# Altium PCB 集成板.PcbDoc
Units mil, origin at the board's own origin, x right, y up, seen from the top; angles counter-clockwise.
Board outline 6000 x 4000 mil, 2 copper layers (Top Layer, Bottom Layer); 47 components, 38 nets, 184 pads, 0 vias.
Unrouted connection lines stored in the file: 127.
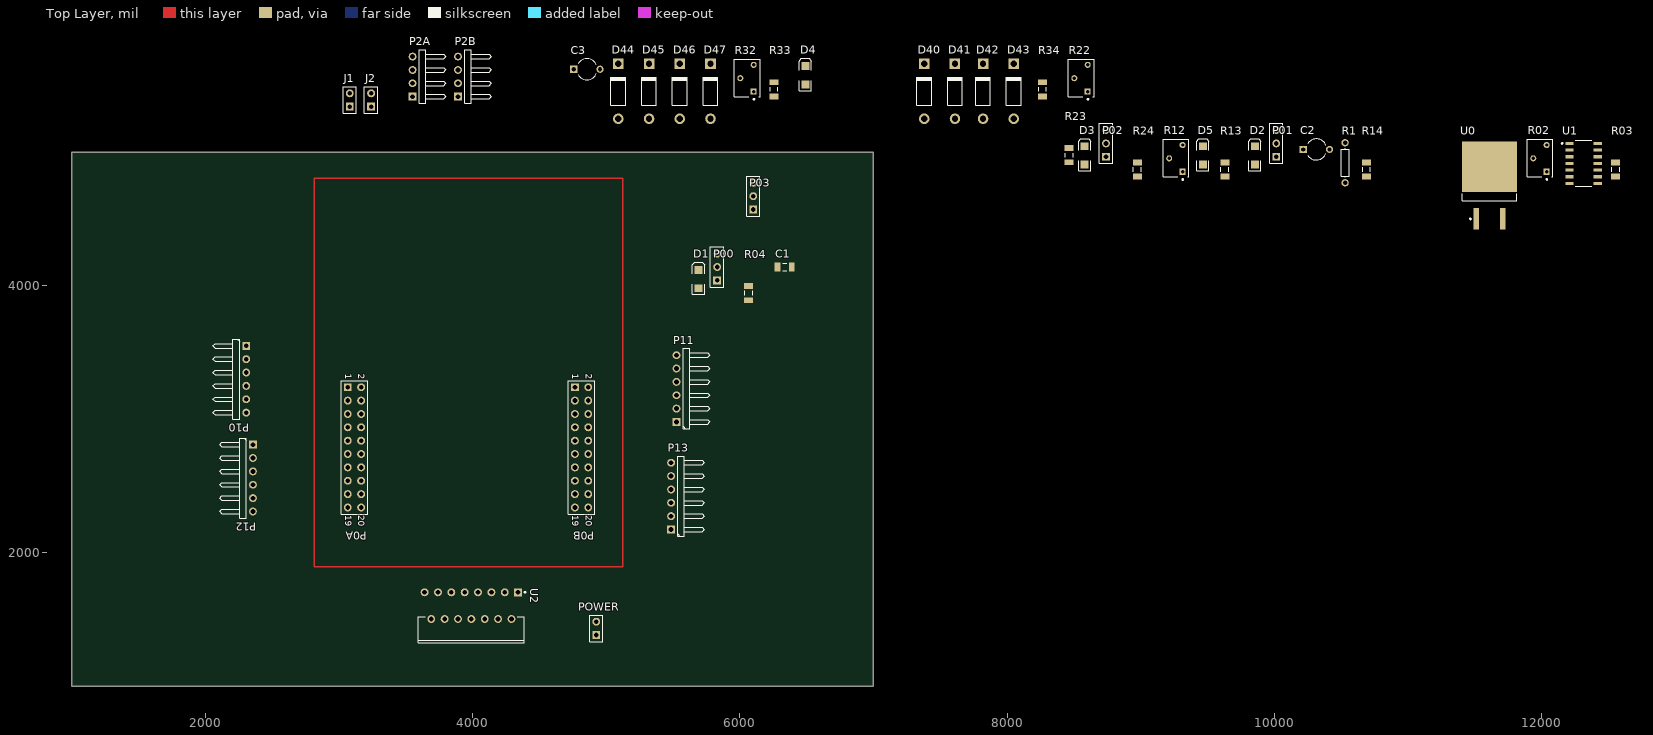
[diagram p0: Top Layer view]
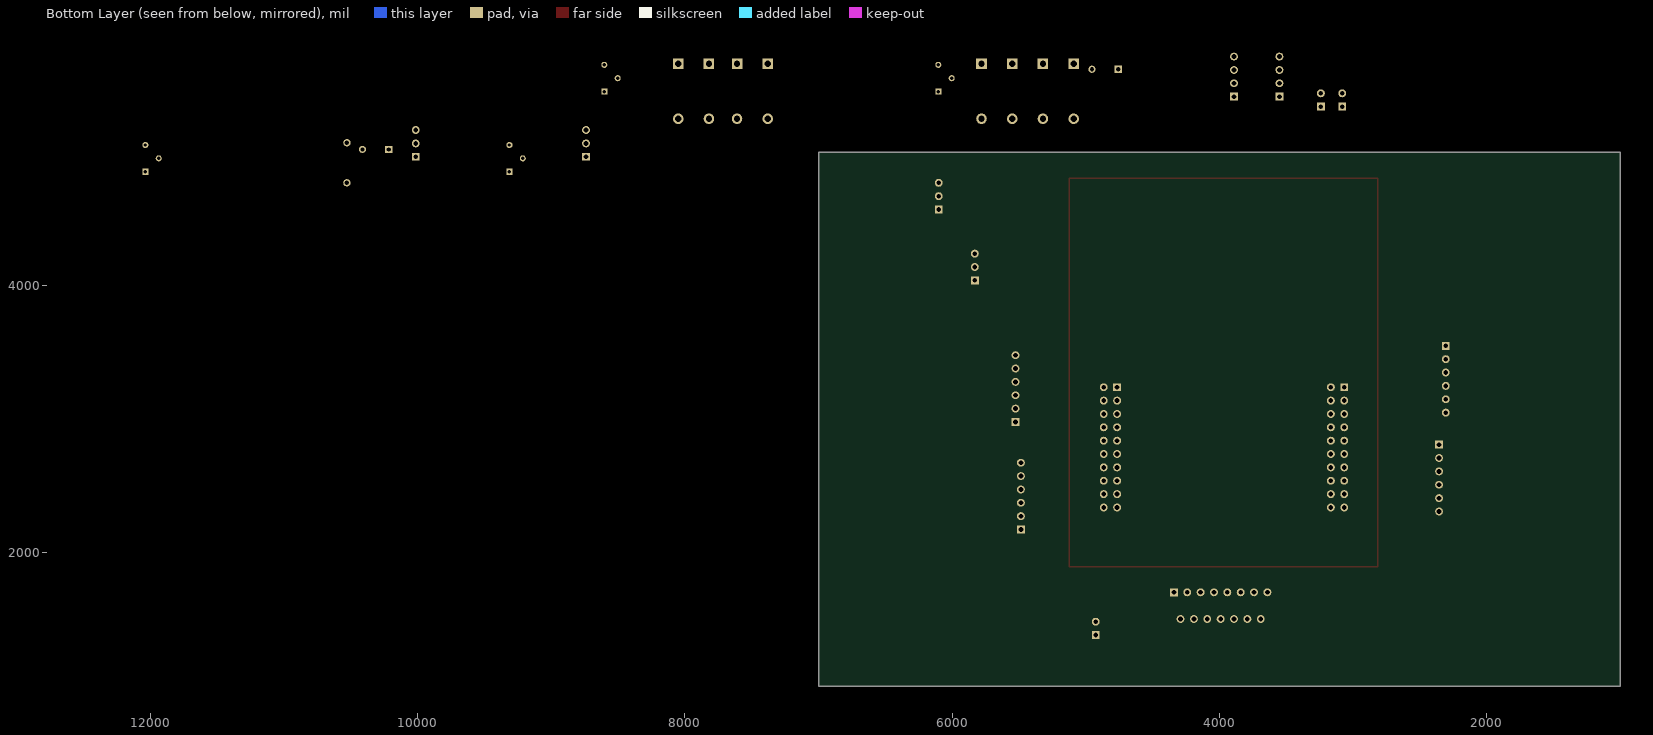
[diagram p1: Bottom Layer view, seen from below]

## Layer stack, top to bottom
Top Solder: solder mask 0.4, Solder Resist, Dk 3.5
Top Layer: signal copper 1.4
Dielectric 1: dielectric 12.6, FR-4, Dk 4.8
Bottom Layer: signal copper 1.4
Bottom Solder: solder mask 0.4, Solder Resist, Dk 3.5

## Board outline
1000,1000 7000,1000 7000,5000 1000,5000

## Design rules (kind name [scope] priority, off if disabled: settings)
Clearance [All] p1: gap=10 ignorepadtopadclearanceinfootprint=FALSE except(0: Arc-Hole Track-Hole SMDPad-Hole THPad-Hole Via-Hole Fill-Hole Poly-Hole Region-Hole Text-Hole)
PolygonConnect [All] p1: connectstyle=Relief reliefconductorwidth=10 reliefentries=4 polygonreliefangle="90 Angle" airgapwidth=10
RoutingVias [All] p1: holewidth=28 width=50 viastyle="Through Hole" minholewidth=28 minwidth=50 maxholewidth=28 maxwidth=50
SolderMaskExpansion [All] p1: expansion=4 istentingtop=FALSE
Width [All] p1: maxlimit=10 minlimit=10 preferedwidth=10
30 further rules are at their usual default settings.

## Components (designator, comment, footprint, x,y, rotation, side; value= is the part's Value field where it differs from the comment)
C1 "Cap Semi" C1206 6335,4140 r0 top value=100pF
C2 "Cap2" CAPR5-4X5 10315,5020 r0 top value=220uF
C3 "Cap2" CAPR5-4X5 4855,5620 r0 top value=220uF
D1 "LED2" 3.2X1.6X1.1 5690,4050 r90 top
D2 "LED2" 3.2X1.6X1.1 9855,4975 r90 top
D3 "LED2" 3.2X1.6X1.1 8580,4975 r90 top
D4 "LED2" 3.2X1.6X1.1 6490,5575 r90 top
D5 "LED2" 3.2X1.6X1.1 9465,4975 r90 top
D40 "Diode 1N4007" DO-41 7380,5455 r90 top
D41 "Diode 1N4007" DO-41 7610,5455 r90 top
D42 "Diode 1N4007" DO-41 7820,5455 r90 top
D43 "Diode 1N4007" DO-41 8050,5455 r90 top
D44 "Diode 1N4007" DO-41 5090,5455 r90 top
D45 "Diode 1N4007" DO-41 5320,5455 r90 top
D46 "Diode 1N4007" DO-41 5550,5455 r90 top
D47 "Diode 1N4007" DO-41 5780,5455 r90 top
J1 "Header 2" HDR1X2 3080,5340 r90 top
J2 "Header 2" HDR1X2 3240,5340 r90 top
P00 "Header 3" HDR1X3 5830,4040 r90 top
P0A "Header 10X2" HDR2X10 3065,3240 r270 top
P0B "Header 10X2" HDR2X10 4765,3240 r270 top
P01 "Header 3" HDR1X3 10015,4965 r90 top
P02 "Header 3" HDR1X3 8740,4965 r90 top
P2A "Header 4H" HDR1X4H 3550,5415 r90 top
P2B "Header 4H" HDR1X4H 3890,5415 r90 top
P03 "Header 3" HDR1X3 6100,4570 r90 top
P10 "Header 6H" HDR1X6H 2305,3550 r270 top
P11 "Header 6H" HDR1X6H 5525,2980 r90 top
P12 "Header 6H" HDR1X6H 2355,2810 r270 top
P13 "Header 6H" HDR1X6H 5485,2175 r90 top
POWER "Header 2" HDR1X2 4925,1385 r90 top
R1 "Res1" AXIAL-0.3 10530,4920 r90 top value=1K
R02 "3266W-1-103LF" FP-3266W-MFG 11990,4955 r90 top value=10kΩ
R03 "Res2" C1206 12555,4870 r90 top value=1K
R04 "Res2" C1206 6065,3945 r90 top value=1K
R12 "3266W-1-103LF" FP-3266W-MFG 9265,4955 r90 top value=10kΩ
R13 "Res2" C1206 9630,4870 r90 top value=1K
R14 "Res2" C1206 10690,4870 r90 top value=1K
R22 "3266W-1-103LF" FP-3266W-MFG 8555,5555 r90 top value=10kΩ
R23 "Res2" C1206 8465,4976.85 r90 top value=1K
R24 "Res2" C1206 8975,4870 r90 top value=1K
R32 "3266W-1-103LF" FP-3266W-MFG 6055,5555 r90 top value=10kΩ
R33 "Res2" C1206 6255,5470 r90 top value=1K
R34 "Res2" C1206 8265,5470 r90 top value=1K
U0 "L7805CD2T-TR" TO-263_M 11610,4750 r90 top
U1 "LM339DR" FP-D0014A-MFG 12315,4915 r0 top
U2 "L298N" STM-FM-15 3990,1605 r270 top

## Footprints (in the part's own frame and the unit in brackets; to place one, negate y for a bottom-side part, rotate by r counter-clockwise, add the part's x,y. Pads: shape width x height; smd on the part's side, far side on the other; paste and mask are expansions set on the pad)
3.2X1.6X1.1 [mm] "SMT LED; 2 Flat Leads"
  rect 1.5x1.5 smd: 1(-1.75,0) 2(1.75,0)
  silkscreen extent -2.9,-1.15 3.2,1.15
AXIAL-0.3 [mm] "Axial Device, Thru-Hole; 2 Leads; 0.3 in Pin Spacing"
  round 1.4 hole 0.85: 1(-3.81,0) 2(3.81,0)
  silkscreen extent -2.77,-0.76 2.77,0.76
C1206 [mm] "Chip Capacitor, Body 3.2x1.6mm, IPC High Density"
  rect 1.1x1.7 smd: 1(-1.35,0) 2(1.35,0)
  silkscreen extent -0.4,-0.75 0.4,0.75, body extent -1.7,-0.9 1.7,0.9, height 1.3
CAPR5-4X5 [mm] "Capacitor; 2 Leads"
  rect 1.35x1.35 hole 0.8: 1(-2.5,0)
  round 1.35 hole 0.8: 2(2.5,0)
  silkscreen extent -1.69,-2 1.82,2
DO-41 [mm] "Diode, Axial; Body 5.2 x 2.7 mm (LxDia. max), Lead Dia. 0.86 mm (max)"
  round 2 hole 1.2: 1(-5.23,0)
  rect 2x2 hole 1.2: 2(5.23,0)
  silkscreen extent -2.65,-1.4 2.75,1.4
FP-3266W-MFG [mm]
  rect 1.15x1.15 hole 0.65 paste-1000 mask+0: 1(-2.595,-1.23)
  round 1.15 hole 0.65 paste-1000 mask+0: 2(-0.055,1.31) 3(2.485,-1.23)
  silkscreen extent -4.17,-2.44 3.54,2.44, body extent -3.64,-2.54 3.64,2.54, height 0.25
FP-D0014A-MFG [mm]
  rect 1.55x0.6 smd paste-1000 mask+0: 1(-2.7,3.81) 2(-2.7,2.54) 3(-2.7,1.27) 4(-2.7,0) 5(-2.7,-1.27) 6(-2.7,-2.54) 7(-2.7,-3.81) 8(2.7,-3.81) 9(2.7,-2.54) 10(2.7,-1.27) 11(2.7,0) 12(2.7,1.27) 13(2.7,2.54) 14(2.7,3.81)
  silkscreen extent -4.2,-4.38 1.55,4.38, body extent -3.57,-4.62 3.57,4.62, height 0.25
HDR1X2 [mm] "Connector; Header; 2 Position"
  rect 1.5x1.5 hole 0.9: 1(0,0)
  round 1.5 hole 0.9: 2(2.54,0)
  silkscreen extent -1.27,-1.27 3.81,1.27
HDR1X3 [mm] "Connector; Header; 3 Position"
  rect 1.5x1.5 hole 0.9: 1(0,0)
  round 1.5 hole 0.9: 2(2.54,0) 3(5.08,0)
  silkscreen extent -1.27,-1.27 6.35,1.27
HDR1X4H [mm] "Connector; Header; 4 Position; Right Angle"
  rect 1.5x1.5 hole 0.9: 1(0,0)
  round 1.5 hole 0.9: 2(2.54,0) 3(5.08,0) 4(7.62,0)
  silkscreen extent -1.27,-6.35 8.89,-1.27
HDR1X6H [mm] "Connector; Header; 6 Position; Right Angle"
  rect 1.5x1.5 hole 0.9: 1(0,0)
  round 1.5 hole 0.9: 2(2.54,0) 3(5.08,0) 4(7.62,0) 5(10.16,0) 6(12.7,0)
  silkscreen extent -1.27,-6.35 13.97,-1.27
HDR2X10 [mm] "Connector; Header; 10x2 Position"
  rect 1.5x1.5 hole 0.9: 1(0,0)
  round 1.5 hole 0.9: 2(0,2.54) 3(2.54,0) 4(2.54,2.54) 5(5.08,0) 6(5.08,2.54) 7(7.62,0) 8(7.62,2.54) 9(10.16,0) 10(10.16,2.54) 11(12.7,0) 12(12.7,2.54) 13(15.24,0) 14(15.24,2.54) 15(17.78,0) 16(17.78,2.54) 17(20.32,0) 18(20.32,2.54) 19(22.86,0) 20(22.86,2.54)
  silkscreen extent -1.27,-1.27 24.13,3.81
STM-FM-15 [mm] "FM, 15-Leads, Body 20.2x5mm, Pitch 1.27mm"
  rect 1.5x1.5 hole 0.9: 1(-2.54,8.89)
  round 1.5 hole 0.9: 2(2.54,7.62) 3(-2.54,6.35) 4(2.54,5.08) 5(-2.54,3.81) 6(2.54,2.54) 7(-2.54,1.27) 8(2.54,0) 9(-2.54,-1.27) 10(2.54,-2.54) 11(-2.54,-3.81) 12(2.54,-5.08) 13(-2.54,-6.35) 14(2.54,-7.62) 15(-2.54,-8.89)
  silkscreen extent -2.66,-10.1 7.09,10.32, body extent -2.8,-10.1 7.09,10.1, height 21
TO-263_M [mm] "D2-PAK, 4-Leads, Body 9.2x10.2mm, Pitch 2.54mm, Lead Span 15.4mm, IPC Low Density"
  rect 4.1x1.05 smd: 1(-6.35,2.54) 3(-6.35,-2.54)
  rect 9.6x10.45 smd: 4(3.6,0)
  silkscreen extent -6.47,-5.2 -1.6,5.2, body extent -2.9,-5.2 6.45,5.2, height 4.6

## Part data
C1: "Capacitor (Semiconductor SIM Model)", LatestRevisionDate=29-May-2009, LatestRevisionNote="IPC-7351 Footprint Added.", PackageDescription="Chip Capacitor", PackageReference=C1206, Published=8-Jun-2000, Publisher="Altium Limited"
C2 C3: "Capacitor", PackageDescription="Capacitor; 2 Leads", PackageReference=CAPR5-4X5, Published=23-Sep-2002, Publisher="Altium Limited"
D1 D2 D3 D4 D5: "Typical RED, GREEN, YELLOW, AMBER GaAs LED", LatestRevisionDate=17-Jul-2002, LatestRevisionNote="Re-released for DXP Platform.", PackageDescription="SM LED; 2 Flat Leads", PackageReference=3.2X1.6X1.1, PackageVersion=Feb-2002, Published=8-Jun-2000, Publisher="Altium Limited"
D40 D41 D42 D43 D44 D45 D46 D47: "1 Amp General Purpose Rectifier", Code_JEDEC=DO-204-AL, ComponentLink1Description="Manufacturer Link", ComponentLink1URL=http://www.fairchildsemi.com/, ComponentLink2Description=Datasheet, ComponentLink2URL=http://www.fairchildsemi.com/ds/1N%2F1N4001.pdf, DatasheetVersion=1998, LatestRevisionDate=17-Jul-2002, LatestRevisionNote="Re-released for DXP Platform.", PackageDescription="Diode, Axial; Body 5.2 x 2.7 mm (LxDia. max), Lead Dia. 0.86 mm (max)", PackageReference=DO-41, PackageVersion=Aug-1999, Published=8-Jun-2000, Publisher="Altium Limited"
J1 J2 POWER: "Header, 2-Pin", LatestRevisionDate=17-Jul-2002, LatestRevisionNote="Re-released for DXP Platform.", Publisher="Altium Limited"
P00 P01 P02 P03: "Header, 3-Pin", LatestRevisionDate=17-Jul-2002, LatestRevisionNote="Re-released for DXP Platform.", Publisher="Altium Limited"
P0A P0B: "Header, 10-Pin, Dual row", LatestRevisionDate=17-Jul-2002, LatestRevisionNote="Re-released for DXP Platform.", Publisher="Altium Limited"
P2A P2B: "Header, 4-Pin, Right Angle", LatestRevisionDate=17-Jul-2002, LatestRevisionNote="Re-released for DXP Platform.", Publisher="Altium Limited"
P10 P11 P12 P13: "Header, 6-Pin, Right Angle", LatestRevisionDate=17-Jul-2002, LatestRevisionNote="Re-released for DXP Platform.", Publisher="Altium Limited"
R1 R03 R04 R13 R14 R23 R24 R33 R34: "Resistor", LatestRevisionDate=17-Jul-2002, LatestRevisionNote="Re-released for DXP Platform.", Published=8-Jun-2000, Publisher="Altium Limited"
  R1: PackageDescription="Axial Device, Thru-Hole; 2 Leads; 0.3 in Pin Spacing", PackageReference=AXIAL-0.3
  R03 R04 R13 R14 R23 R24 R33 R34: PackageDescription="Axial Device, Thru-Hole; 2 Leads; 0.4 in Pin Spacing", PackageReference=AXIAL-0.4
R02 R12 R22 R32: library part CMP-07234-000016-1, "TRIMMER 10K OHM 0.25W PC PIN TOP", Manufacturer=Bourns, Package=3266W, Power Rating=0.25W, Resistance=10kΩ, Temperature="-55°C to +125°C", Temperature Coefficient=100ppm/°C, Temperature Range High=+125°C, Temperature Range Low=-55°C, Tolerance=10%, Automotive=No, Category=Res, ComponentLink2Description=Datasheet, ComponentLink2URL=https://www.bourns.com/docs/Product-Datasheets/3266.pdf, Composition=Cermet, Device Class L1="Passive Components", Device Class L2=Resistors, Device Class L3="Variable Resistors and Potentiometers", Digikey Description="TRIMMER 10K OHM 0.25W PC PIN TOP", Height=9.02mm, Lead Free=Yes, Manufacturer Part Number=3266W-1-103LF, Mouser Description="Trimmer Resistors - Through Hole 1/4 10Kohms 10% SQ W/Standoff Sealed", Octopart=https://octopart.com/3266w-1-103lf-bourns-81445, RoHS=TRUE, Series=3266, Standoff Height=0.43mm
U0: library part CMP-0244-00213-1, "Positive Voltage Regulator, 3-Pin D2PAK, Tape and Reel", ComponentLink1Description="Manufacturer URL", ComponentLink1URL=http://www.st.com, ComponentLink2Description=Datasheet, ComponentLink2URL=http://www.st.com/internet/com/TECHNICAL_RESOURCES/TECHNICAL_LITERATURE/DATASHEET/CD00000444.pdf, DatasheetVersion=16/11/2011, PackageDescription="3-Pin Transistor Outline Package 2.54 mm Pitch, 15.4 mm Lead Span (D2PAK)", PackageReference=TO-263, PackageVersion=2011
U1: library part CMP-04896-000028-1, "IC QUAD DIFF COMP 14-SOIC", Input Bias Current=-0.025uA, Input Offset Voltage=2mV, Manufacturer="Texas Instruments", Max Dual Supply Voltage=18V, Max Junction Temp=+70°C, Max Supply Voltage=30V, Min Dual Supply Voltage=1V, Min Supply Voltage=2V, Nominal Supply Current=0.8mA, Output Current Per Channel=6mA, Package=D0014A, Temperature="0°C to +70°C", Temperature Range Low=0°C, Automotive=No, Category=IC, ComponentLink2Description=Datasheet, ComponentLink2URL=http://www.ti.com/lit/ds/symlink/lm339.pdf, Device Class L1="Integrated Circuits (ICs)", Device Class L2="Linear ICs", Device Class L3=Comparators, Digikey Description="IC QUAD DIFF COMP 14-SOIC", Height=1.75mm, Ipc Land Pattern Name=SOIC127P600X175-14, Lead Free=Yes, Manufacturer Part Number=LM339DR, Mouser Description="Analog Comparators Quad Differential", Number Of Channels=4, Octopart=https://octopart.com/lm339dr-texas+instruments-45532, Response Time=1.3us, RoHS=TRUE, Standoff Height=0.1mm, Temperature Range High=+70°C
U2: library part CMP-2000-06526-1, "Dual Full-Bridge Driver, 4.8 to 46 V, -40 to 150 degC, 15-Pin FM (MW 15L), RoHS, Tube", Driver Case Style=Multiwatt, Manufacturer=STMicroelectronics, Operating Temperature Max=130°C, Operating Temperature Min=-25°C, Output Current=2A, Output Voltage=46V, Package Description="15-Pin Flange Mount, Body 5 x 19.6 mm, Pitch 1.27 mm", Package Reference=FM-15, PartNumber=L298, Supply Voltage Max=7V, Supply Voltage Min=4.5V, Automotive Qualification Standard=-, Datasheet URL=https://datasheet.ciiva.com/15109/getdatasheetpartid-50682-15109332.pdf, Datasheet Version=01/2000, Manufacturer URL=http://www.st.com/, Motor Type=FullBridge, Mounting Technology=ThroughHole, MSL=-, No. of Outputs=4Outputs, No. of Pins=15Pins, Packaging=Each, Product Range=-, SVHC=NoSVHC(17-Dec-2015)

## Nets (pads, with @x,y where several pads share a name; then routed paths per layer and width w, separated by ;. In a path a pad name is that pad's centre, name@x,y a point inside that pad or via, vN(x,y) a via of type N, cw(c..) or ccw(c..) an arc to the next point about the centre after c; other vN are vias at no path point)
+5: C1.1 C2.1 C3.1 D40.2 D41.2 D42.2 D43.2 J1.1 J2.1 P00.3 P0A.2 P01.3 P02.3 P2A.1 P2A.2 P2A.3 P2A.4 P03.3 P10.2 P11.2 P12.2 P13.2 R1.2 R02.1 R03.2 R04.1 R12.1 R13.2 R14.2 R22.1 R23.1 R24.2 R32.1 R33.2 R34.2 U0.3 U1.3 U2.9
+12: POWER.1 U0.1 U2.4
E1A: P0A.3 P10.3
E1B: P0A.9 P10.4
E2A: P0B.14 P11.3
E2B: P0B.16 P11.4
E3A: P0A.11 P12.3
E3B: P0A.15 P12.4
E4A: P0B.18 P13.3
E4B: P0B.20 P13.4
GND: C1.2 C2.2 C3.2 D5.2 D44.1 D45.1 D46.1 D47.1 P00.1 P0A.4 P0B.2 P01.1 P02.1 P2B.1 P2B.2 P2B.3 P2B.4 P03.1 P10.5 P11.5 P12.5 P13.5 POWER.2 R02.3 R12.3 R22.3 R32.3 U0.4 U1.12 U2.1 U2.8 U2.15
IR0: D1.2 P0A.6 R03.1 U1.1
IR1: D2.2 P0A.8 R13.1 U1.2
IR2: D3.2 P0A.10 R23.2 U1.14
IR3: D4.2 P0A.12 R33.1 U1.13
M10: D40.1 D44.2 P10.6 P12.6 U2.2
M11: D41.1 D45.2 P10.1 P12.1 U2.3
M20: D42.1 D46.2 P11.6 P13.6 U2.13
M21: D43.1 D47.2 P11.1 P13.1 U2.14
MA1: P0B.9 U2.5
MA2: P0B.11 U2.7
MB1: P0B.13 U2.10
MB2: P0B.15 U2.12
NetD1_1: D1.1 R04.2
NetD2_1: D2.1 R14.1
NetD3_1: D3.1 R24.1
NetD4_1: D4.1 R34.1
NetD5_1: D5.1 R1.1
NetP00_2: P00.2 U1.7
NetP01_2: P01.2 U1.5
NetP02_2: P02.2 U1.9
NetP03_2: P03.2 U1.11
NetR02_2: R02.2 U1.6
NetR12_2: R12.2 U1.4
NetR22_2: R22.2 U1.8
NetR32_2: R32.2 U1.10
PWM1: J2.2 P0B.1 U2.6
PWM2: J1.2 P0B.3 U2.11
pads on no net: P0A.1 P0A.5 P0A.7 P0A.13 P0A.14 P0A.16 P0A.17 P0A.18 P0A.19 P0A.20 P0B.4 P0B.5 P0B.6 P0B.7 P0B.8 P0B.10 P0B.12 P0B.17 P0B.19
copper on no net: | length 10440
  Top Layer w10: 2815,1895 5125,1895 5125,4805 2815,4805 2815,1895

## Text inside footprints (layer, text, board x,y; h text height)
P0A: Top Overlay "20" at 3145,2280 h50 r270; Top Overlay "19" at 3045,2280 h50 r270; Top Overlay "1" at 3045,3340 h50 r270; Top Overlay "2" at 3145,3340 h50 r270
P0B: Top Overlay "20" at 4845,2280 h50 r270; Top Overlay "19" at 4745,2280 h50 r270; Top Overlay "1" at 4745,3340 h50 r270; Top Overlay "2" at 4845,3340 h50 r270